# Altium PCB DiPho_digital.PcbDoc (part 2 of 3)
Units mm, origin at the board's own origin, x right, y up, seen from the top; angles counter-clockwise.
Board outline 25.2 x 25.2 mm, 4 copper layers (Top Layer, GND, Inner Layer 2, Bottom Layer), stack 1.562 mm thick; 68 components, 54 nets, 272 pads, 116 vias.
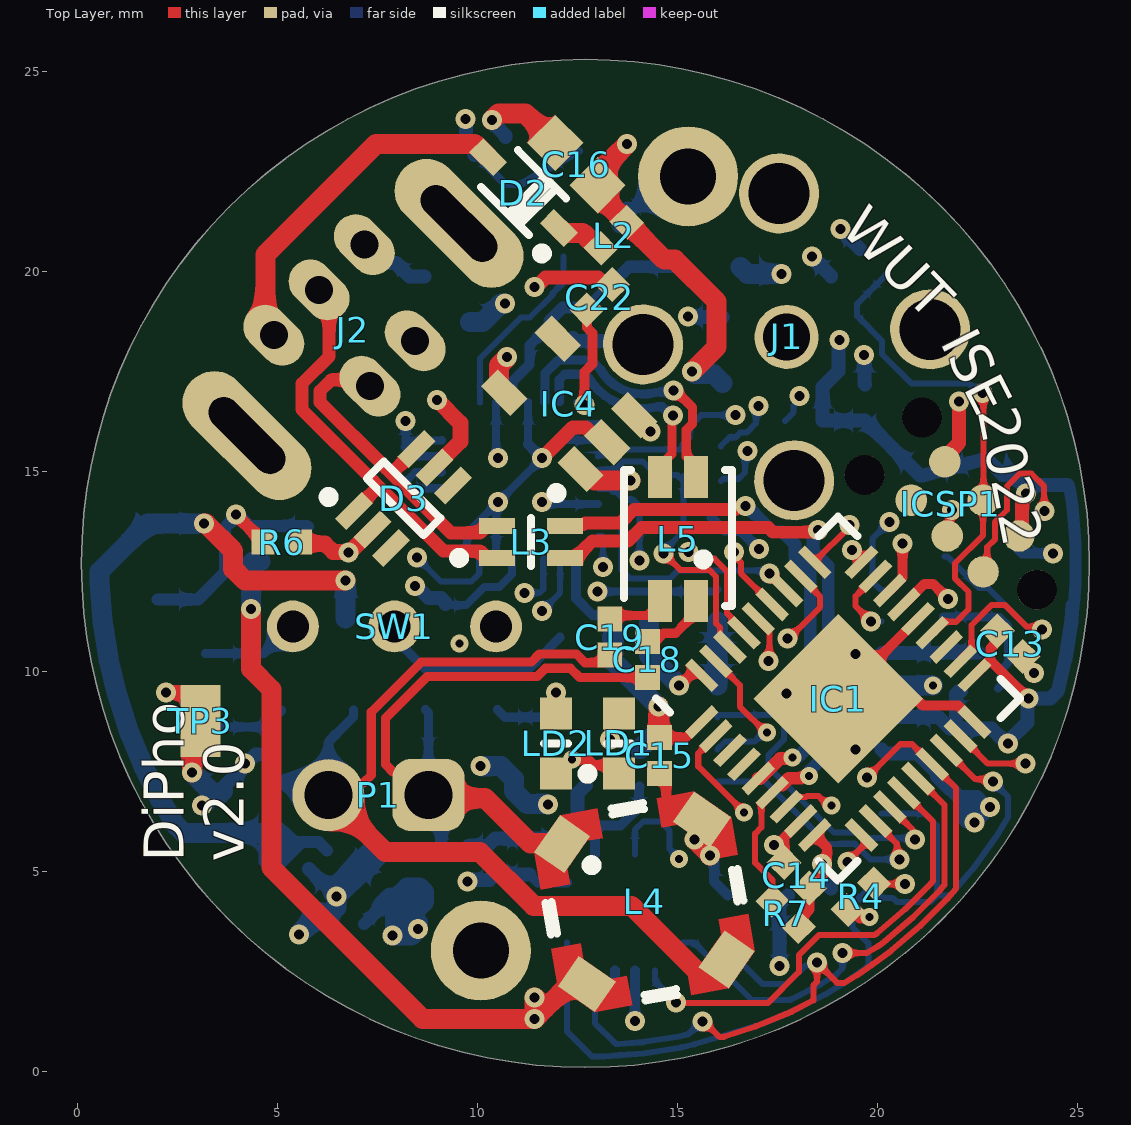
[diagram p0: Top Layer view]

## Part data (continued)
SW1: "WS-SLTV THT Mini Slide Switch, Opposite Side Connection, SPDT, 12VDC, 500mA, 800g", Manufacturer="Wurth Elektronik", Operating Temperature Max=85°C, Operating Temperature Min=-40°C, Rated Current=500mA, Rated Voltage=12VDC, Category="Slide Switches", Circuit=SPDT, ComponentLink1Description="Website Link", ComponentLink1URL=https://www.we-online.com/redexpert/article/450301014042?ad, ComponentLink2Description="Datasheet Link", ComponentLink2URL=https://www.we-online.com/redexpert/spec/450301014042?ad, Contact Material="Copper Alloy", Contact Plating=Gold, Height=6.4mm, Length=10mm, Manufacturer Part Number=450301014042, Match Code=WS-SLTV, Mount="Through Hole", Operation Force=800g, Packaging=Bulk, Terminal Material="Copper Alloy", Terminal Plating=Gold, Width=2.5mm
T1: "P-CHANNEL MOSFET WITH DIODE", Case=SOT23-3, Manufacturer="DIODES INCORPORATED", Author="CERN DEM JLC", Bonding=No, Component Type=Standard, ComponentHeight=1.4mm, CreateDate=17.11.2014, Device=DMP2066LSN-7, HelpURL=\\cern.ch\dfs\Applications\Altium\Datasheets\DMP2066LSN-7.pdf, LatestRevisionDate=17.11.2014, Manufacturer Part Number=DMP2066LSN-7, Mounted=Yes, PackageDescription="SOT, 0.95mm Pitch; 3 Pin, 1.60mm W X 3.00mm L X 1.40mm H body, IPC Medium Density", Part Description="20V, 4.6A, P-Channel Enhancement Mode MOSFET", Part Number=DMP2066LSN-7, Pin Count=3, PressFit=No, Sense=No, SMD=Yes, Socket=No
TP3: "Conn Terminal Post 1 POS Solder ST SMD 1 Port T/R", Color=Natural, Manufacturer=Harwin, Supplier Part Number 1=952-2665-1-ND, Body Material=Brass, Category="Headers and Wire Housings", ComponentLink1Description=https://cdn.harwin.com/pdfs/Harwin_PC_PCB_Hardware.pdf?src-supplier=Digi-Key, ComponentLink1URL=https://cdn.harwin.com/pdfs/Harwin_PC_PCB_Hardware.pdf?src-supplier=Digi-Key, ComponentLink2Description=https://cdn.harwin.com/pdfs/Harwin_PC_PCB_Hardware.pdf?src-supplier=Avnet+Europe, ComponentLink2URL=https://cdn.harwin.com/pdfs/Harwin_PC_PCB_Hardware.pdf?src-supplier=Avnet+Europe, ComponentLink3Description=https://cdn.harwin.com/pdfs/Harwin_PC_PCB_Hardware.pdf?src-supplier=Mouser, ComponentLink3URL=https://cdn.harwin.com/pdfs/Harwin_PC_PCB_Hardware.pdf?src-supplier=Mouser, ComponentLink4Description=https://cdn.harwin.com/pdfs/S2761R.pdf?src-supplier=Digi-Key, ComponentLink4URL=https://cdn.harwin.com/pdfs/S2761R.pdf?src-supplier=Digi-Key, ComponentLink5Description=https://cdn.harwin.com/pdfs/Harwin_PC_PCB_Hardware.pdf?src-supplier=TTI, ComponentLink5URL=https://cdn.harwin.com/pdfs/Harwin_PC_PCB_Hardware.pdf?src-supplier=TTI, Manufacturer Part Number=S2761-46R, Material="Copper Alloy", Mount="Surface Mount", Packaging="Tape and Reel", Plating=Tin, Pricing 1="1=0,28000, 10=0,23500, 25=0,20760, 50=0,19060, 100=0,18310, 250=0,16444, 500=0,15696, 1000=0,13080 (USD)", RoHS=Yes, RoHS Compliant=Yes, Stock 1=101371, Supplier 1=Digi-Key

## Free pads (board coordinates)
  round 2.5 hole 1.4: 2(10.084,3.023) 2(15.265,22.377)

## Via types
v1: diameter 0.5, hole 0.25, Top Layer to Bottom Layer, tented both sides, 104 vias
v2: diameter 0.45, hole 0.2, Top Layer to Bottom Layer, tented both sides, 10 vias
v3: diameter 0.5, hole 0.25, GND to Inner Layer 2, tented both sides, 2 vias

## Nets (pads, with @x,y where several pads share a name; then routed paths per layer and width w, separated by ;. In a path a pad name is that pad's centre, name@x,y a point inside that pad or via, vN(x,y) a via of type N, cw(c..) or ccw(c..) an arc to the next point about the centre after c; other vN are vias at no path point)
AFE_TYPE_IND: IC1.30 J3.5 | length 8.5
  Top Layer w0.152: IC1.30@20.307,6.616 20.874,6.05 20.874,5.865 v1(20.94,5.798)
  Bottom Layer w0.152: J3.5@16,8.85 16.058,8.908 17.483,8.908 17.667,8.724 17.667,8.302 17.272,7.907 17.272,7.613 18.914,5.972 19.551,5.972 19.685,5.838 20.9,5.838 v1(20.94,5.798)